# Altium PCB DOAN1.PcbDoc
Units mm, origin at the board's own origin, x right, y up, seen from the top; angles counter-clockwise.
Board outline 87.12 x 45.59 mm, 2 copper layers (Top Layer, Bottom Layer); 21 components, 16 nets, 106 pads, 6 vias.
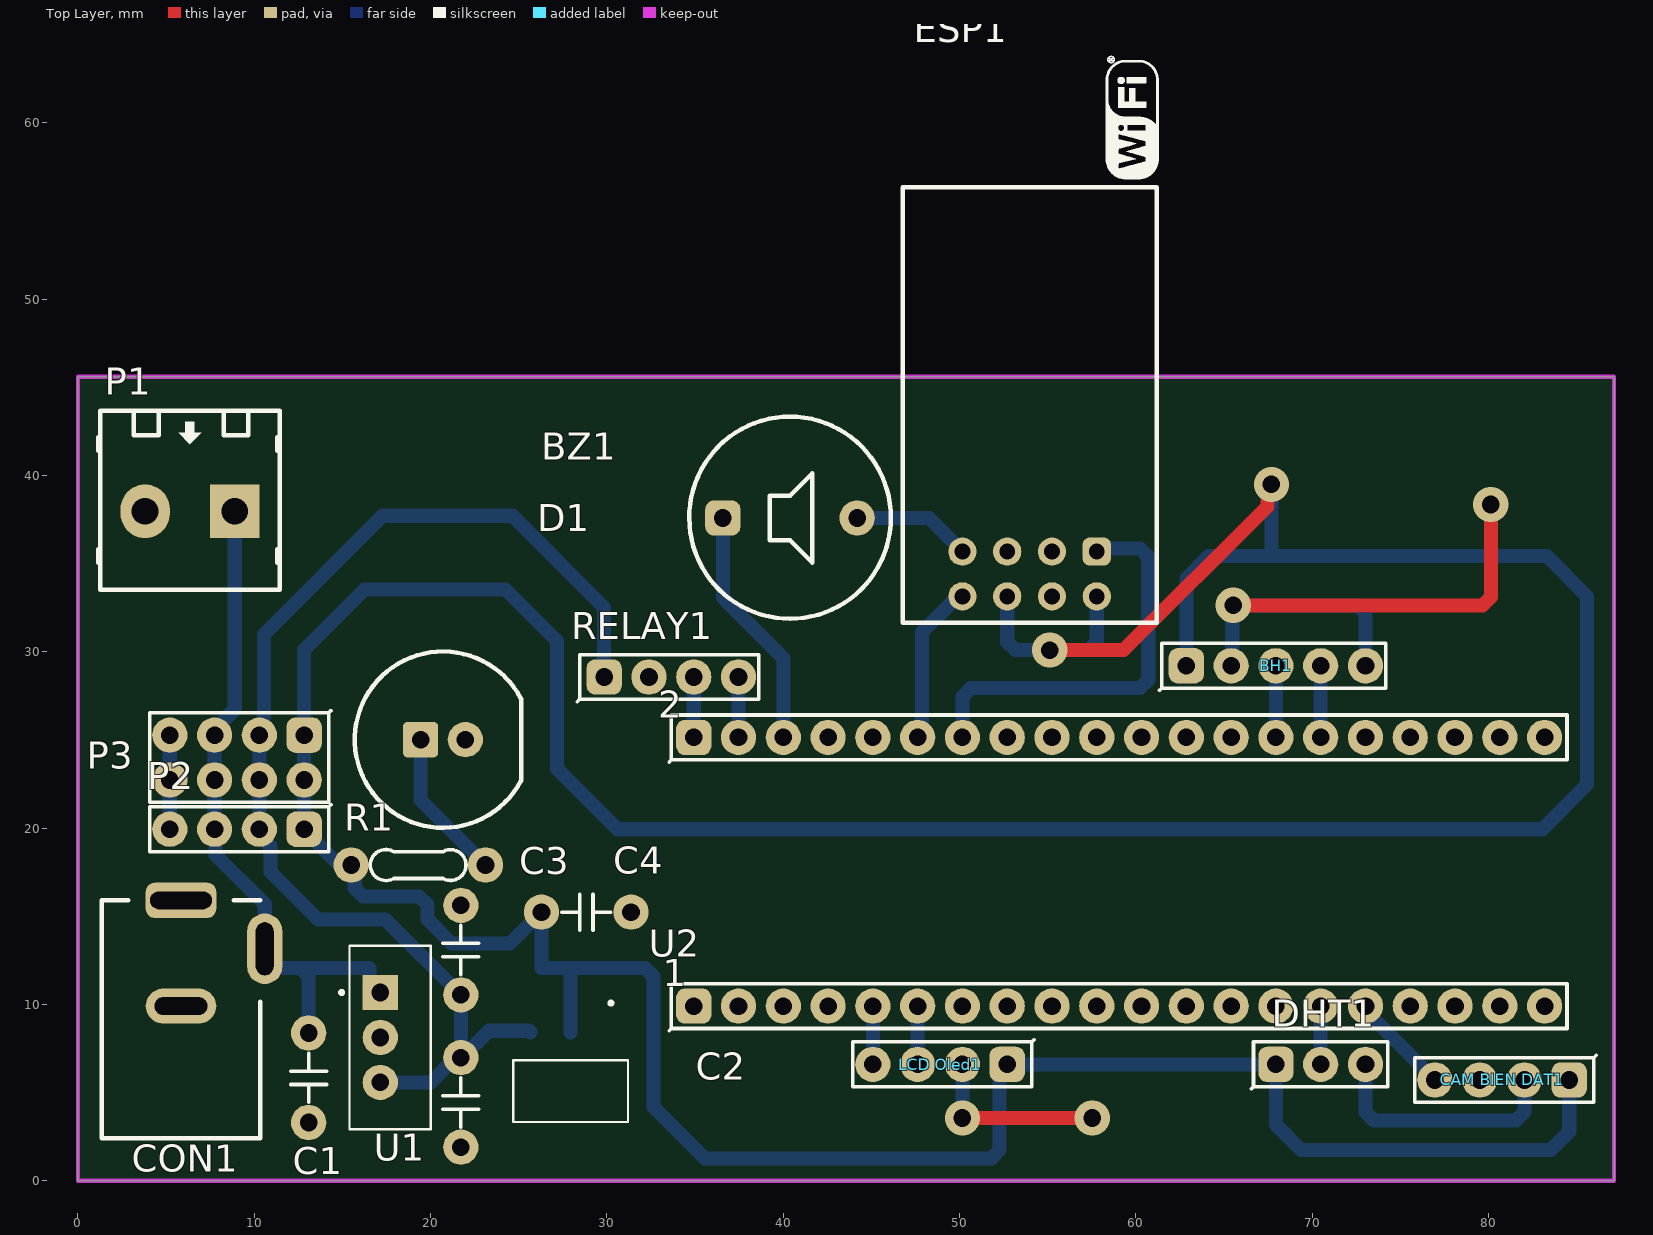
[diagram p0: Top Layer view]
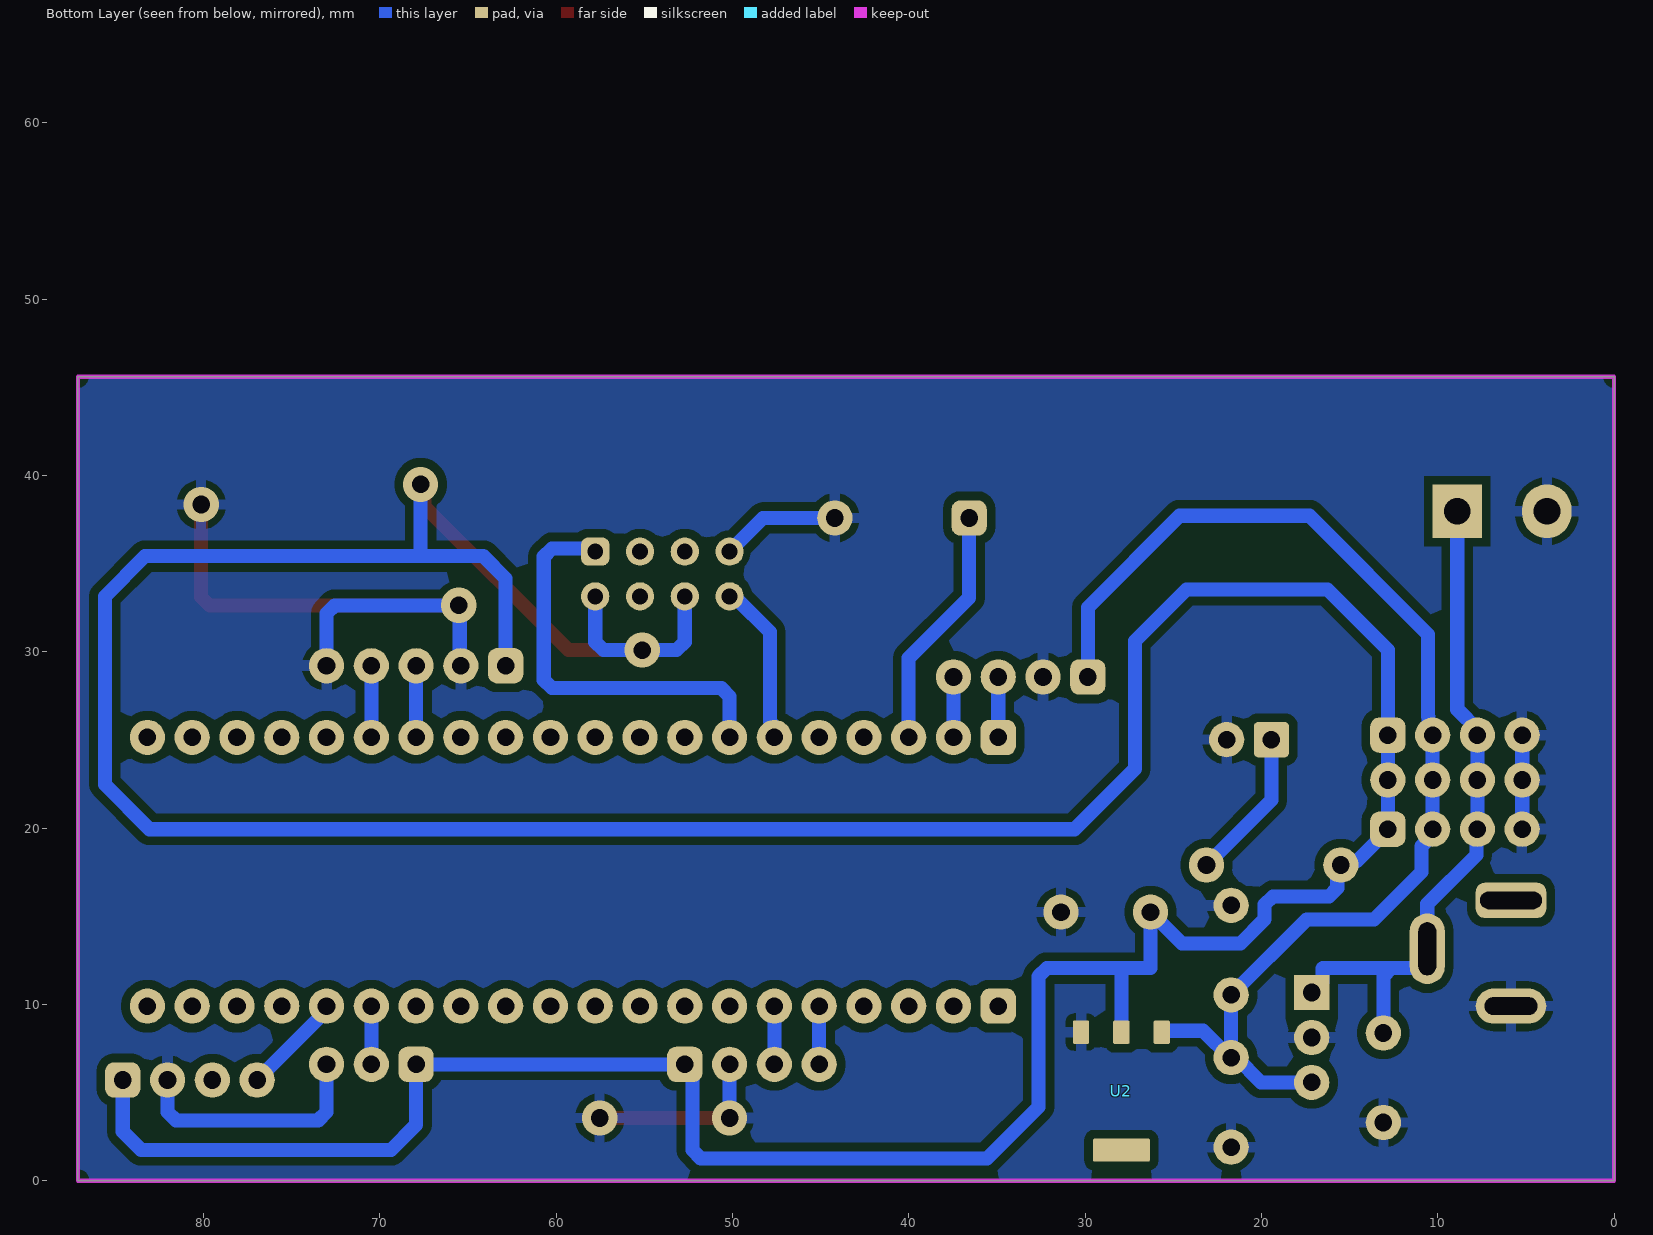
[diagram p1: Bottom Layer view, seen from below]

## Layer stack, top to bottom
Top Solder: solder mask 0.0102, Solder Resist, Dk 3.5
Top Layer: signal copper 0.0356
Dielectric 1: dielectric 0.32, FR-4, Dk 4.8
Bottom Layer: signal copper 0.0356
Bottom Solder: solder mask 0.0102, Solder Resist, Dk 3.5

## Board outline
0,45.593 87.122,45.593 87.122,0 0,0

## Design rules (kind name [scope] priority, off if disabled: settings)
Clearance [All] p1: gap=0.5 ignorepadtopadclearanceinfootprint=TRUE
PolygonConnect [All] p1: connectstyle=Relief reliefconductorwidth=0.6 reliefentries=4 polygonreliefangle="90 Angle" airgapwidth=0.4
RoutingVias [InDrillLayerPair('No Drill Pair')] p1: holewidth=0.711 width=1.27 viastyle="Through Hole" minholewidth=0.6 minwidth=1.27 maxholewidth=0.711 maxwidth=1.27
SolderMaskExpansion [All] p1: expansion=0.102 istentingtop=FALSE
SupplyNets "Schematic Supply Nets_3" [InNet('5V')] p1: voltage=0.000
SupplyNets "Schematic Supply Nets_2" [InNet('VCC')] p2: voltage=0.000
SupplyNets "Schematic Supply Nets_1" [InNet('3.3V')] p3: voltage=0.000
SupplyNets "Schematic Supply Nets" [InNet('GND')] p4: voltage=0.000
UnpouredPolygon [InNet('No Net')] p1:
Width [All] p1: maxlimit=1 minlimit=0.6 preferedwidth=0.8 toplayer_maxwidth=0.8 minimp=50.000000 maximp=50.000000 favimp=50.000000
29 further rules are at their usual default settings.

## Classes and differential pairs
component class DOAN1: C1 C2 C3 CON1 D1 P1 R1 U1 U2

## Components (designator, comment, footprint, x,y, rotation, side; value= is the part's Value field where it differs from the comment)
1 "Header 20" HDR/Header/20 59.055,9.906 r0 top
2 "Header 20" HDR/Header/20 59.055,25.146 r0 top
BH1 "BH1750 I2C" HDR/Header/5 67.945,29.21 r0 top (schematic designator "BH1750 I2C")
BZ1 "Buzzer" BUZZER 36.576,37.592 r0 top
C1 "10uF" "CAP Ceramic/W200" 13.081,8.382 r270 top
C2 "10uF" "CAP Ceramic/W200" 21.717,6.985 r270 top
C3 "10uF" "CAP Ceramic/W200" 21.717,10.541 r90 top (schematic designator C4)
C4 "10uF" "CAP Ceramic/W200" 26.289,15.24 r0 top (schematic designator C3)
"CAM BIEN DAT1" "CAM BIEN DAT" HDR/Header/4 80.772,5.715 r180 top (schematic designator "CAM BIEN DAT")
CON1 "CON DC PWR" CONN/DC/PWR/5.0MM 5.842,15.906 r90 top
D1 "LED RED" "LED 10MM - RED" 20.701,25.019 r0 top
DHT1 "DHT22" HDR/Header/3 70.485,6.604 r0 top (schematic designator DHT22)
ESP1 "Component_1" "ESP8266 ESP-01" 53.975,34.417 r0 top (schematic designator ESP01)
"LCD Oled1" "LCD Oled" HDR/Header/4 48.895,6.604 r180 top (schematic designator "LCD Oled")
P1 "Header 2" HDR/Terminal/2 6.35,37.973 r180 top (schematic designator P3)
P2 "Header 4" HDR/Header/4 9.017,19.939 r180 top (schematic designator P1)
P3 "Header 4X2" HDR/Header/8/DL 9.017,24.003 r180 top (schematic designator P2)
R1 "R" "R 1/4W/300" 23.114,17.907 r180 top (schematic designator R2)
RELAY1 "RELAY" HDR/Header/4 33.655,28.575 r0 top (schematic designator RELAY)
U1 "L7805ACV" "PCBComponent_1 - duplicate" 7.874,21.092 r0 top
U2 "AMS1117-3.3" SOT229P700X180-4N 27.94,5.08 r270 top

## Footprints (in the part's own frame and the unit in brackets; to place one, negate y for a bottom-side part, rotate by r counter-clockwise, add the part's x,y. Pads: shape width x height; smd on the part's side, far side on the other; paste and mask are expansions set on the pad)
BUZZER [mm] "DC Buzzer 5V/12V"
  rrect50% 2x2 hole 1: 1(0,0)
  round 2 hole 1: 2(7.62,0)
  silkscreen extent -1.91,-5.71 9.53,5.75, body extent -5.64,-6 9.81,6, height 9.65
"CAP Ceramic/W200" [mm]
  round 2 hole 1 mask+0.102: 1(0,0) 2(5.08,0)
  silkscreen extent 1.14,-1.02 3.94,1.02, body extent -0.14,-1.06 5.22,1.04, height 4.59
CONN/DC/PWR/5.0MM [mm]
  rrect50% 2x4 hole 1 slot 3.5 at 90 deg: 1(0,0)
  oval 2x4 hole 1 slot 3 at 90 deg: 2(-6,0)
  oval 4x2 hole 1 slot 3 at 0 deg: 3(-2.75,-4.75)
  silkscreen extent -13.5,-4.5 0,4.5, body extent -13.58,-5 0.25,4.5, height 11.02
"ESP8266 ESP-01" [mm] "ESP8266 ESP-01"
  rrect50% 1.6x1.6 hole 0.9: 1(3.81,1.27)
  round 1.6 hole 0.9: 2(3.81,-1.27) 3(1.27,1.27) 4(1.27,-1.27) 5(-1.27,1.27) 6(-1.27,-1.27) 7(-3.81,1.27) 8(-3.81,-1.27)
  silkscreen extent -7.2,-2.77 7.31,29.38, body extent -7.28,-2.78 7.22,22.02, height 8.5
HDR/Header/3 [mm]
  rrect50% 2x2 hole 1 mask+0.102: 1(-2.54,0)
  round 2 hole 1 mask+0.102: 2(0,0) 3(2.54,0)
  silkscreen extent -3.94,-1.4 3.81,1.27, body extent -3.81,-1.27 3.81,1.27, height 8.89
HDR/Header/4 [mm]
  rrect50% 2x2 hole 1 mask+0.102: 1(-3.81,0)
  round 2 hole 1 mask+0.102: 2(-1.27,0) 3(1.27,0) 4(3.81,0)
  silkscreen extent -5.33,-1.4 4.95,1.27, body extent -5.08,-1.27 5.08,1.27, height 8.89
HDR/Header/5 [mm]
  rrect50% 2x2 hole 1 mask+0.102: 1(-5.08,0)
  round 2 hole 1 mask+0.102: 2(-2.54,0) 3(0,0) 4(2.54,0) 5(5.08,0)
  silkscreen extent -6.6,-1.4 6.22,1.27, body extent -6.35,-1.27 6.35,1.27, height 8.89
HDR/Header/8/DL [mm]
  rrect50% 2x2 hole 1 mask+0.102: 1(-3.81,-1.27)
  round 2 hole 1 mask+0.102: 2(-3.81,1.27) 3(-1.27,-1.27) 4(-1.27,1.27) 5(1.27,-1.27) 6(1.27,1.27) 7(3.81,-1.27) 8(3.81,1.27)
  silkscreen extent -5.33,-2.67 4.95,2.54, body extent -5.08,-2.54 5.08,2.54, height 8.89
HDR/Header/20 [mm]
  rrect50% 2x2 hole 1 mask+0.102: 1(-24.13,0)
  round 2 hole 1 mask+0.102: 2(-21.59,0) 3(-19.05,0) 4(-16.51,0) 5(-13.97,0) 6(-11.43,0) 7(-8.89,0) 8(-6.35,0) 9(-3.81,0) 10(-1.27,0) 11(1.27,0) 12(3.81,0) 13(6.35,0) 14(8.89,0) 15(11.43,0) 16(13.97,0) 17(16.51,0) 18(19.05,0) 19(21.59,0) 20(24.13,0)
  silkscreen extent -25.53,-1.4 25.4,1.27, body extent -25.4,-1.27 25.4,1.27, height 8.89
HDR/Terminal/2 [mil] "Header 2, 2 pin, hight 400mil, Pin to Pin 200mil, Colour Green"
  rect 110x120 hole 60: 1(-100,0)
  oval 110x120 hole 60: 2(100,0)
  silkscreen extent -200,-225 205,175, body extent -229,-218 200,168, height 559
"LED 10MM - RED" [mm]
  rrect25% 2x2 hole 1 mask+0.102: 1(-1.27,0)
  round 2 hole 1 mask+0.102: 2(1.27,0)
  silkscreen extent -5,-5 4.44,5, body extent -5.5,-5.5 5.5,5.5, height 14.15
"PCBComponent_1 - duplicate" [mm]
  rect 2x2 hole 1 mask+0.102: 1(9.271,-10.414)
  round 2 hole 1 mask+0.102: 2(9.271,-12.964) 3(9.271,-15.514)
  silkscreen extent 6.98,-18.16 12.13,-7.76, body extent 7.62,-17.97 12.06,-8, height 19.68
"R 1/4W/300" [mm] "Through hole resitor, axial 300mils, 1/4W"
  round 2 hole 1 mask+0.102: 1(0,0) 2(7.62,0)
  silkscreen extent 1.11,-0.88 6.53,0.88, body extent -0.3,-1.2 7.92,1.2, height 2.47
SOT229P700X180-4N [mm]
  rrect15% 1.31x0.93 smd far side: 1(-3.345,2.29) 2(-3.345,0) 3(-3.345,-2.29)
  rrect15% 1.31x3.24 smd far side: 4(3.345,0)
  silkscreen extent -5.1,-3.25 1.75,3.25, body extent -3.5,-3.25 3.5,3.25, height 1.8

## Part data
C1 C2 C3 C4: library part "Capacitor NP", "Capacitor non-pol"
CON1: "DC input connector"
D1: "Typical LED 3-pin 2-color"
P1: "Header, 2-Pin"
P2: "Header, 4-Pin"
P3: "Header, 4-Pin, Dual row"
R1: library part Resistor, "Resistor"
U1: library part CMP-0244-00484-1, "Positive Voltage Regulator, 5V, 3-Pin TO-220", ComponentLink1Description="Manufacturer URL", ComponentLink1URL=http://www.st.com, ComponentLink2Description=Datasheet, ComponentLink2URL=http://www.st.com/internet/com/TECHNICAL_RESOURCES/TECHNICAL_LITERATURE/DATASHEET/CD00000444.pdf, ComponentLink3Description="Package Specification", ComponentLink3URL=http://www.st.com/internet/com/TECHNICAL_RESOURCES/TECHNICAL_LITERATURE/PACKAGE_INFORMATION/CD00004649.pdf, DatasheetVersion=16/11/2011, PackageDescription="TO, Thru-Hole, Vertical, Heatsink Mounted; 3 In-Line Leads; Pitch 2.54 mm", PackageReference=TO220, PackageVersion=ver3.0
U2: "Sot223/Pkg 1-Amp 3.3-Volt Low Drop Out Voltage Regulatator", Package="SOT-223 Seeed Technology", Availability="Not in stock", Check_prices=https://www.snapeda.com/parts/AMS1117-3.3/Advanced+Monolithic+Systems/view-part/?ref=eda, MF="Advanced Monolithic Systems", MP=AMS1117-3.3, Price=None, SnapEDA_Link=https://www.snapeda.com/parts/AMS1117-3.3/Advanced+Monolithic+Systems/view-part/?ref=snap

## Via types
v1: diameter 2, hole 1, Top Layer to Bottom Layer, 6 vias

## Nets (pads, with @x,y where several pads share a name; then routed paths per layer and width w, separated by ;. In a path a pad name is that pad's centre, name@x,y a point inside that pad or via, vN(x,y) a via of type N, cw(c..) or ccw(c..) an arc to the next point about the centre after c; other vN are vias at no path point)
3.3V: "CAM BIEN DAT1.1" "LCD Oled1.1" BH1.1 C4.1 DHT1.1 ESP1.2 ESP1.6 P2.1 P3.1 P3.2 R1.2 U2.2 | length 270.7
  Top Layer w0.8: v1(55.118,30.099) 59.309,30.099 67.461,38.251 67.461,39.267 v1(67.691,39.497)
  Bottom Layer w0.8: P3.1@12.827,24.892 P3.2 P2.1 12.827,19.889 14.587,18.129 15.272,18.129 15.696,17.705 15.696,16.598 16.165,16.129 19.348,16.129 19.817,15.66 19.817,14.834 21.189,13.462 24.511,13.462 C4.1 26.289,12.065 28.067,12.065 ; P3.1 12.827,30.099 16.256,33.528 24.257,33.528 27.178,30.607 27.178,23.368 30.607,19.939 83.058,19.939 85.598,22.479 85.598,33.147 83.312,35.433 67.691,35.433 ; U2.2 27.94,11.938 28.067,12.065 ; ESP1.6 52.705,30.568 53.174,30.099 v1(55.118,30.099) 57.316,30.099 57.785,30.568 ESP1.2 ; BH1.1 62.865,34.163 64.135,35.433 67.691,35.433 ; v1(67.691,39.497) 67.691,35.433 ; 84.582,5.715 84.582,2.794 83.536,1.748 69.372,1.748 67.945,3.175 DHT1.1 52.705,6.604 52.27,6.169 52.27,1.739 51.802,1.27 35.56,1.27 32.639,4.191 32.639,11.596 32.17,12.065 28.067,12.065
5V: C2.1 C3.1 P2.2 P3.3 P3.4 RELAY1.1 U1.3 U2.3 | length 69
  Bottom Layer w0.8: U1.3 20.013,5.578 21.42,6.985 C2.1 ; U2.3 25.65,8.444 25.585,8.509 23.304,8.509 21.78,6.985 C2.1 ; RELAY1.1 29.845,32.512 24.638,37.719 17.272,37.719 10.541,30.988 10.541,26.342 10.517,26.317 10.517,25.503 P3.3 P3.4 P2.2 10.287,19.614 10.927,18.974 10.927,17.521 13.619,14.829 17.429,14.829 C3.1 C2.1
A0: 1.16 "CAM BIEN DAT1.4" | length 5.8
  Bottom Layer w0.8: 1.16 73.025,9.652 76.962,5.715
A1: 1.15 DHT1.2 | length 3.3
  Bottom Layer w0.8: DHT1.2 1.15
A9: 2.6 ESP1.8 | length 9.2
  Bottom Layer w0.8: 2.6 47.778,25.299 47.778,25.965 47.879,26.066 47.879,31.115 49.758,32.994 50.012,32.994 ESP1.8
A10: 2.7 ESP1.1 | length 23.4
  Bottom Layer w0.8: 2.7 50.165,27.471 50.634,27.94 60.237,27.94 60.706,28.409 60.706,35.397 60.237,35.865 57.963,35.865 ESP1.1
B6: 2.14 BH1.3 | length 3.4
  Bottom Layer w0.8: 2.14 BH1.3@67.945,28.575
B7: 2.15 BH1.4 | length 3.4
  Bottom Layer w0.8: 2.15 BH1.4@70.485,28.575
B10: 1.6 "LCD Oled1.3" | length 3.3
  Bottom Layer w0.8: 47.625,6.604 1.6
B11: 1.5 "LCD Oled1.4" | length 3.3
  Bottom Layer w0.8: 45.085,6.604 1.5
B12: 2.1 RELAY1.3 | length 3.4
  Bottom Layer w0.8: 2.1 RELAY1.3
B13: 2.2 RELAY1.4 | length 3.4
  Bottom Layer w0.8: 2.2 RELAY1.4
B14: 2.3 BZ1.1 | length 13.9
  Bottom Layer w0.8: BZ1.1 36.576,33.07 40.005,29.641 2.3
GND: "CAM BIEN DAT1.2" "LCD Oled1.2" BH1.2 BH1.5 BZ1.2 C1.2 C2.2 C3.2 C4.2 CON1.2 D1.2 DHT1.3 ESP1.7 P1.2 P2.4 P3.7 P3.8 RELAY1.2 U1.2 U2.1 | length 70.6
  Top Layer w0.8: v1(50.165,3.556) v1@57.15,3.556 ; BH1.2 BH1.2@65.468,29.273 ; v1(65.532,32.639) 79.668,32.639 80.137,33.108 v1(80.137,38.354)
  Bottom Layer w0.8: P2.4 P3.7 ; U1.2@17.072,8.128 U1.2 ; BZ1.2 48.26,37.592 ESP1.7 ; v1(50.165,3.556) 50.165,6.604 ; BH1.2@65.577,29.382 BH1.2 65.468,29.273 65.468,32.575 v1(65.532,32.639) 72.556,32.639 73.025,32.17 BH1.5 ; DHT1.3 73.025,3.898 73.494,3.429 81.573,3.429 82.042,3.898 82.042,5.715
  other v1: 57.531,3.556
NetD1_1: D1.1 R1.1 | length 8.7
  Bottom Layer w0.8: D1.1@19.431,24.969 D1.1 19.431,21.59 R1.1
VCC: C1.1 CON1.3 P1.1 P2.3 P3.5 P3.6 U1.1 | length 39.5
  Bottom Layer w0.8: P1.1 8.89,26.741 7.747,25.598 P3.5 P3.6 P2.3 7.804,19.882 7.804,18.485 10.592,15.697 10.592,12.712 11.239,12.065 12.612,12.065 ; C1.1@13.406,8.382 C1.1 13.081,11.596 12.612,12.065 ; U1.1@16.726,10.259 U1.1 16.545,11.278 16.545,12.03 16.51,12.065 12.612,12.065
pads on no net: 1.1 1.2 1.3 1.4 1.7 1.8 1.9 1.10 1.11 1.12 1.13 1.14 1.17 1.18 1.19 1.20 2.4 2.5 2.8 2.9 2.10 2.11 2.12 2.13 2.16 2.17 2.18 2.19 2.20 "CAM BIEN DAT1.3" CON1.1 ESP1.3 ESP1.4 ESP1.5 U2.4

## Polygon pours and split planes (outlines as drawn)
GND on Bottom Layer "GND_L02_P000" (solid, remove dead copper, pour order 0): 0,45.593 87.122,45.593 87.122,0.037 87.085,0 0,0

## Keep-outs
Keep-Out Layer:
  the board outline again, w0.254

## Dimensions
87.122,45.593 to 87.104,0.018 on Bottom Layer
0,45.593 to 87.122,45.593 on Bottom Layer

## Text inside footprints (layer, text, board x,y; h text height)
ESP1: Mechanical 13 "ANTENNA AREA" at 46.94,55.959 h0.25; Mechanical 13 "CUTOUT POLYGON" at 46.94,55.451 h0.25